# EAGLE board 3.7LiPoly Management_1.0 (EAGLE 9.2.2)
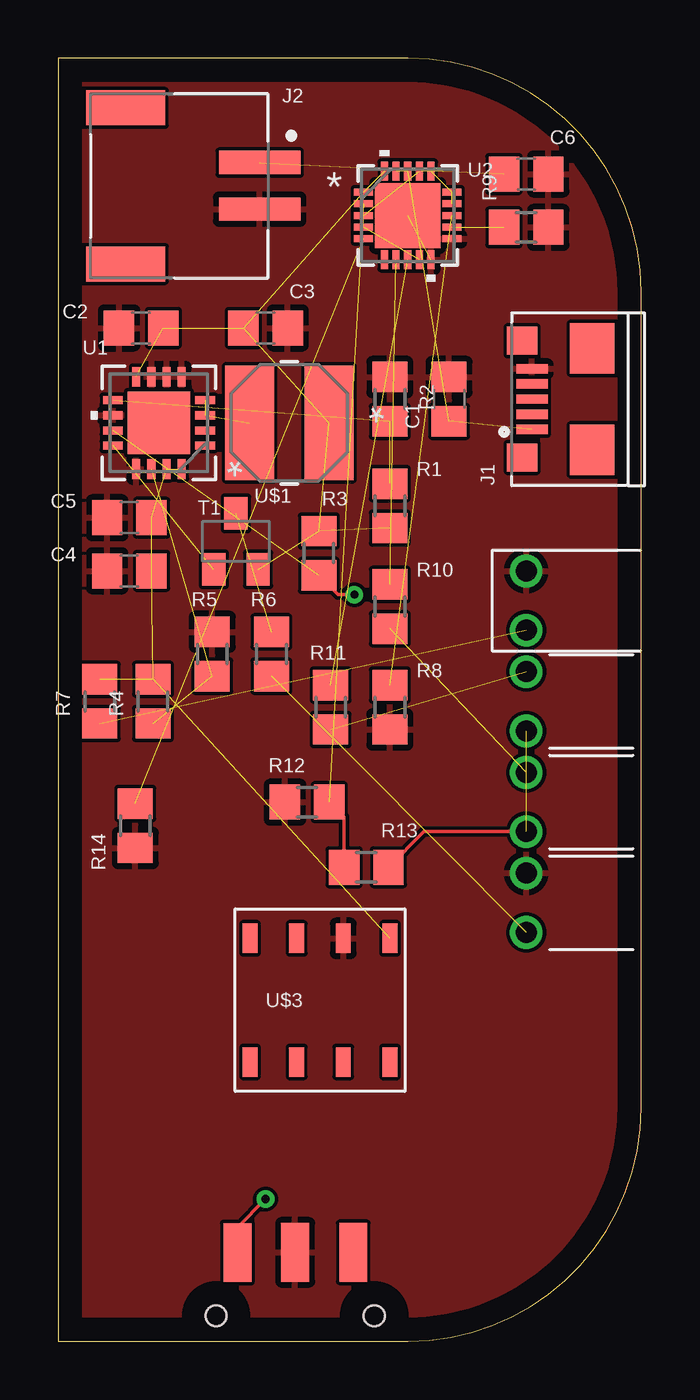
[diagram p0: board, top side]
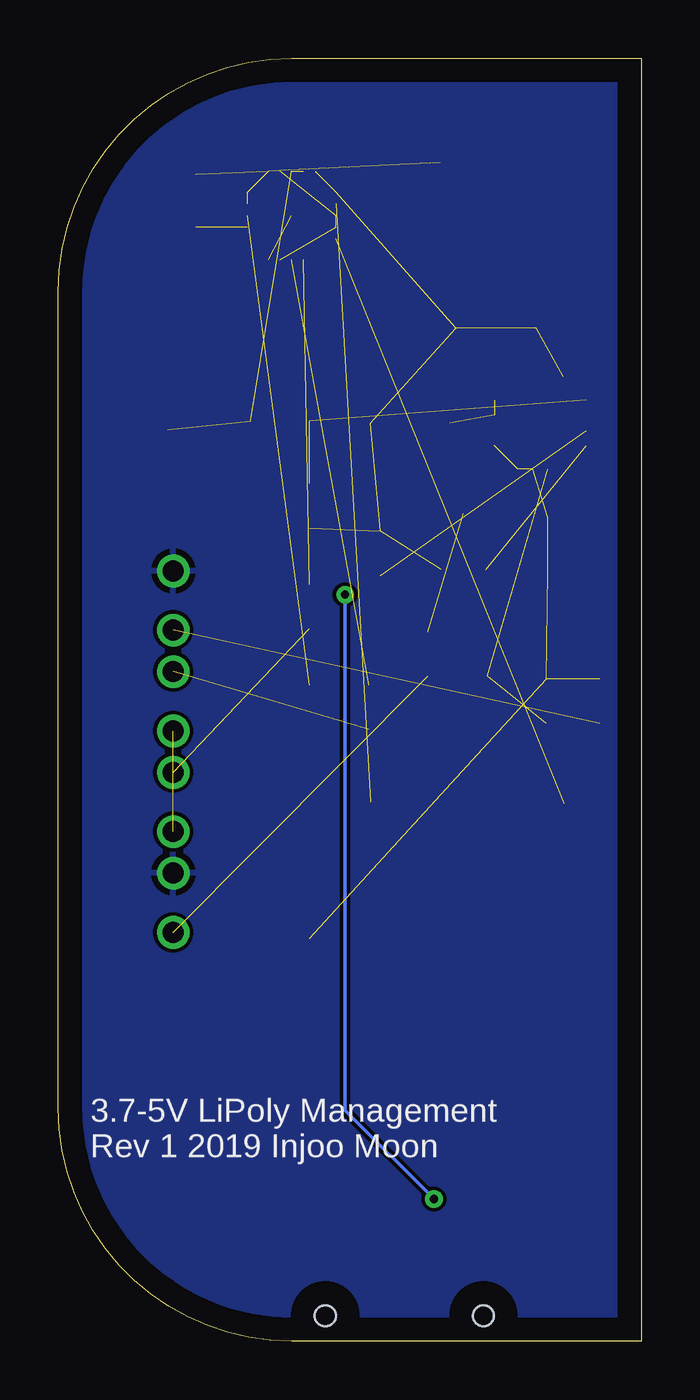
[diagram p1: board, bottom side, seen from below]

Size 25 x 55 mm. Coordinates in mm from the lower left corner, seen from the top.
Outline: 0,0 15,0 arc90 25,10 25,45 arc90 15,55 0,55 0,0
Copper layers (1*16): Top 0.035mm / dielectric 1.5mm / Bottom 0.035mm
Design rules "default": minimum track width 6mil, minimum drill 0.35mm, track to track 6mil, track to pad 6mil, pad to pad 6mil, via to via 6mil, smd to smd 6mil, copper to edge 40mil, drill to drill 6mil, minimum pad ring 10mil, minimum via ring 8mil, stop-mask expansion 4mil, vias tented up to drill 0mil, thermal gap 10mil

## Footprints (pad centres in the part's own frame; a part is rotated, then mirrored left to right if it is on the bottom)
C0805 = smd 1.3 x 1.5: 1 -0.95,0; 2 0.95,0
WP934AD = drill 0.9: ANO -1.27,0; CAT 1.27,0
JAE_DX4R005HJ5R2000 = smd 0.4 x 1.35: 1 -1.3,0; 2 -0.65,0; 3 0,0; 4 0.65,0; 5 1.3,0 | smd 1.2 x 1.3: SH1 -2.5,0.425; SH2 2.5,0.425 | smd 2.15 x 1.9: SH3 -2.175,-2.575; SH4 2.175,-2.575
JST_S2B-PH-SM4-TB(LF)(SN) = smd 1 x 3.5: 1 -1,0; 2 1,0 | smd 1.5 x 3.4: S1 -3.35,-5.75; S2 3.35,-5.75
WP934EW = drill 0.9: ANO -1.27,0; CAT 1.27,0
R0805 = smd 1.3 x 1.5: 1 -0.95,0; 2 0.95,0
SC59-BEC = smd 1 x 1.4: B -0.95,-1.2; C 0,1.2; E 0.95,-1.2
RSA16_2P7X2P7 = smd 0.85 x 0.35: 1 -1.975,0.975; 2 -1.975,0.325; 3 -1.975,-0.325; 4 -1.975,-0.975; 9 1.975,-0.975; 10 1.975,-0.325; 11 1.975,0.325; 12 1.975,0.975 | smd 0.35 x 0.85: 5 -0.975,-1.975; 6 -0.325,-1.975; 7 0.325,-1.975; 8 0.975,-1.975; 13 0.975,1.975; 14 0.325,1.975; 15 -0.325,1.975; 16 -0.975,1.975 | smd 2.692 x 2.692: 17 0,0
QFN20_4X4MC = smd 0.813 x 0.305: 1 -1.892,1; 2 -1.892,0.5; 3 -1.892,0; 4 -1.892,-0.5; 5 -1.892,-1; 11 1.892,-1; 12 1.892,-0.5; 13 1.892,0; 14 1.892,0.5; 15 1.892,1 | smd 0.305 x 0.813: 6 -1,-1.892; 7 -0.5,-1.892; 8 0,-1.892; 9 0.5,-1.892; 10 1,-1.892; 16 1,1.892; 17 0.5,1.892; 18 0,1.892; 19 -0.5,1.892; 20 -1,1.892 | smd 2.794 x 2.794: 21 0,0
IND_5028 = smd 2.1 x 4.9: 1 -1.7,0; 2 1.7,0
JS102011SAQN = smd 1.194 x 2.515: 1 -2.477,2.527; 2 0,2.54; 3 2.489,2.54 | hole 0.9: -3.391,-0.178; 3.391,-0.178
M22-6340442 = smd 1.27 x 0.635: P1 -2.54,2.54; P2 -2.54,0.54; P3 -2.54,-1.46; P4 -2.54,-3.46; P5 2.76,-3.46; P6 2.76,-1.46; P7 2.76,0.54; P8 2.76,2.54

## Placement (x,y rotation side)
C1  10uF  [C0805]  16.76,40.39 90 top
C2  10uF  [C0805]  3.56,43.43 180 top
C3  0.1uF  [C0805]  8.89,43.43 0 top
C4  2.2uF  [C0805]  3.05,33.02 180 top
C5  100uF  [C0805]  3.05,35.31 180 top
C6  10uF  [C0805]  20.07,50.04 0 top
CHARGE  YELLOW  [WP934AD]  20.07,27.43 90 top
DONE  GREEN  [WP934AD]  20.07,23.11 90 top
J1  DX4R005HJ5R2000  [JAE_DX4R005HJ5R2000]  20.32,40.39 90 top
J2  S2B-PH-SM4-TB(LF)(SN)  [JST_S2B-PH-SM4-TB(LF)(SN)]  8.64,49.53 270 top
LBO  RED  [WP934AD]  20.07,18.8 90 top
POWERON  BLUE  [WP934EW]  20.07,31.75 90 top
R1  1.87M  [R0805]  14.22,35.81 270 top
R2  340K  [R0805]  14.22,40.39 270 top
R3  200K  [R0805]  11.18,33.78 90 top
R4  1.87M  [R0805]  4.06,27.43 90 top
R5  200K  [R0805]  6.6,29.46 270 top
R6  1K  [R0805]  9.14,29.46 90 top
R7  1K  [R0805]  1.78,27.43 90 top
R8  1K  [R0805]  14.22,27.18 90 top
R9  100K  [R0805]  20.07,47.75 180 top
R10  1K  [R0805]  14.22,31.5 270 top
R11  1K  [R0805]  11.68,27.18 270 top
R12  100K  [R0805]  10.67,23.11 0 top
R13  270K  [R0805]  13.21,20.32 0 top
R14  15K  [R0805]  3.3,22.1 90 top
T1  MMUN2133LT1G  [SC59-BEC]  7.62,34.29 0 top
U1  TPS61090RSAR  [RSA16_2P7X2P7]  4.32,39.37 180 top
U2  MCP73871T-2CCI/ML  [QFN20_4X4MC]  14.99,48.26 0 top
U$1  6.8uH  [IND_5028]  9.91,39.37 180 top
U$2  JS102011SAQN  [JS102011SAQN]  10.16,1.27 0 top
U$3  M22-6340442  [M22-6340442]  11.68,14.73 270 top

## Library data of the parts
C1-C6 = rcl; SPICEPREFIX: C
CHARGE DONE LBO POWERON = KingBright
J1 = DX4R005HJ5R2000; DESCRIPTION: DX4 series, receptacle, on-board, right-angle standard mount, surface mount; MF: JAE Electronics; MP: DX4R005HJ5R2000; PACKAGE: None
J2 = S2B-PH-SM4-TB_LF__SN_; DESCRIPTION: PH Series 2 Position 2 mm Pitch Surface Mount Side Entry Shrouded Header; MF: JST Sales; MP: S2B-PH-SM4-TB_LF__SN_; PACKAGE: FakePackage u
R1-R14 = rcl; SPICEPREFIX: R
T1 = transistor
U1 = TPS61090RSAR; MANUFACTURER_PART_NUMBER: TPS61090RSAR; VENDOR: Texas Instruments
U2 = MCP73871T-2CCI; MANUFACTURER_PART_NUMBER: MCP73871T2CCIML; VENDOR: Microchip
U$1 = VLCF5020T-6R8N1R1
U$2 = JS102011SAQN
U$3 = M22-6340442

## Nets
+3V3: CHARGE.ANO DONE.ANO R13.2
CTRL: U2.3 U2.4 U2.9 U2.17
FB: R4.1 R5.2 U1.14
GND: C1.2 C2.2 C3.2 C4.2 C5.2 C6.2 J1.5 J2.2 LBO.CAT POWERON.CAT R2.1 R5.1 R8.1 R9.1 R12.1 R14.1 U1.5 U1.6 U1.7 U1.10 U1.13 U2.10 U2.11 U2.21 U$2.2 U$3.P2
LBO: T1.B U1.12
N$1: R1.1 R2.2 U1.9
N$2: R3.1 U1.11 U$2.1
N$3: CHARGE.CAT R11.2
N$4: R8.2 U2.13
N$5: R6.2 T1.C
N$6: LBO.ANO R6.1
N$7: POWERON.ANO R7.1
N$8: R9.2 U2.12
N$9: DONE.CAT R10.2
N$11: R11.1 U2.8
N$12: R10.1 U2.7
N$13: R14.2 U2.5
N$14: R12.2 R13.1 U2.2
SW: U1.3 U1.4 U$1.2
VBAT [VBAT]: C2.1 C3.1 R1.2 R3.2 T1.E U1.8 U2.1 U2.20 U$1.1
VBUS: C1.1 J1.1 U2.18 U2.19
VLIPO: C6.1 J2.1 U2.14 U2.15 U2.16
VOUT: C4.1 C5.1 R4.2 R7.2 U1.1 U1.15 U1.16 U$3.P1

## Tracks (layer width: path | path; a pad name or v marks a point on that pad's centre or on a via)
+3V3  (1 unrouted)
  Top 0.152: R13.2 15.68,21.84 DONE.ANO
CTRL  (3 unrouted)
FB  (2 unrouted)
GND  (1 unrouted)
  pour Bottom: -1.78,56.9 28.45,56.9 28.45,-3.05 -1.78,-3.05
  pour Top: -2.29,57.4 28.96,57.4 28.96,-3.56 -2.29,-3.56
LBO  (1 unrouted)
N$1  (2 unrouted)
N$2  (via drill 0.35)  (1 unrouted)
  Top 0.152: R3.1 12,32 v12.7,32 | v8.89,6.1 7.68,4.89 U$2.1
  Bottom 0.152: v12.7,32 12.7,9.91 v8.89,6.1
N$3  (1 unrouted)
N$4  (1 unrouted)
N$5  (1 unrouted)
N$6  (1 unrouted)
N$7  (1 unrouted)
N$8  (1 unrouted)
N$9  (1 unrouted)
N$11  (1 unrouted)
N$12  (1 unrouted)
N$13  (1 unrouted)
N$14  (1 unrouted)
  Top 0.152: R13.1 12.26,22.47 R12.2
SW  (2 unrouted)
VBAT  (8 unrouted)
VBUS  (3 unrouted)
VLIPO  (4 unrouted)
VOUT  (7 unrouted)

## Text on the board
bNames: 3.7-5V LiPoly Management / Rev 1 2019 Injoo Moon